# Altium PCB d_efx.PcbDoc (part 1 of 2)
Units mm, origin at the board's own origin, x right, y up, seen from the top; angles counter-clockwise.
Board outline 73.09 x 90.97 mm, 2 copper layers (Top Layer, Bottom Layer); 115 components, 88 nets, 354 pads, 67 vias.
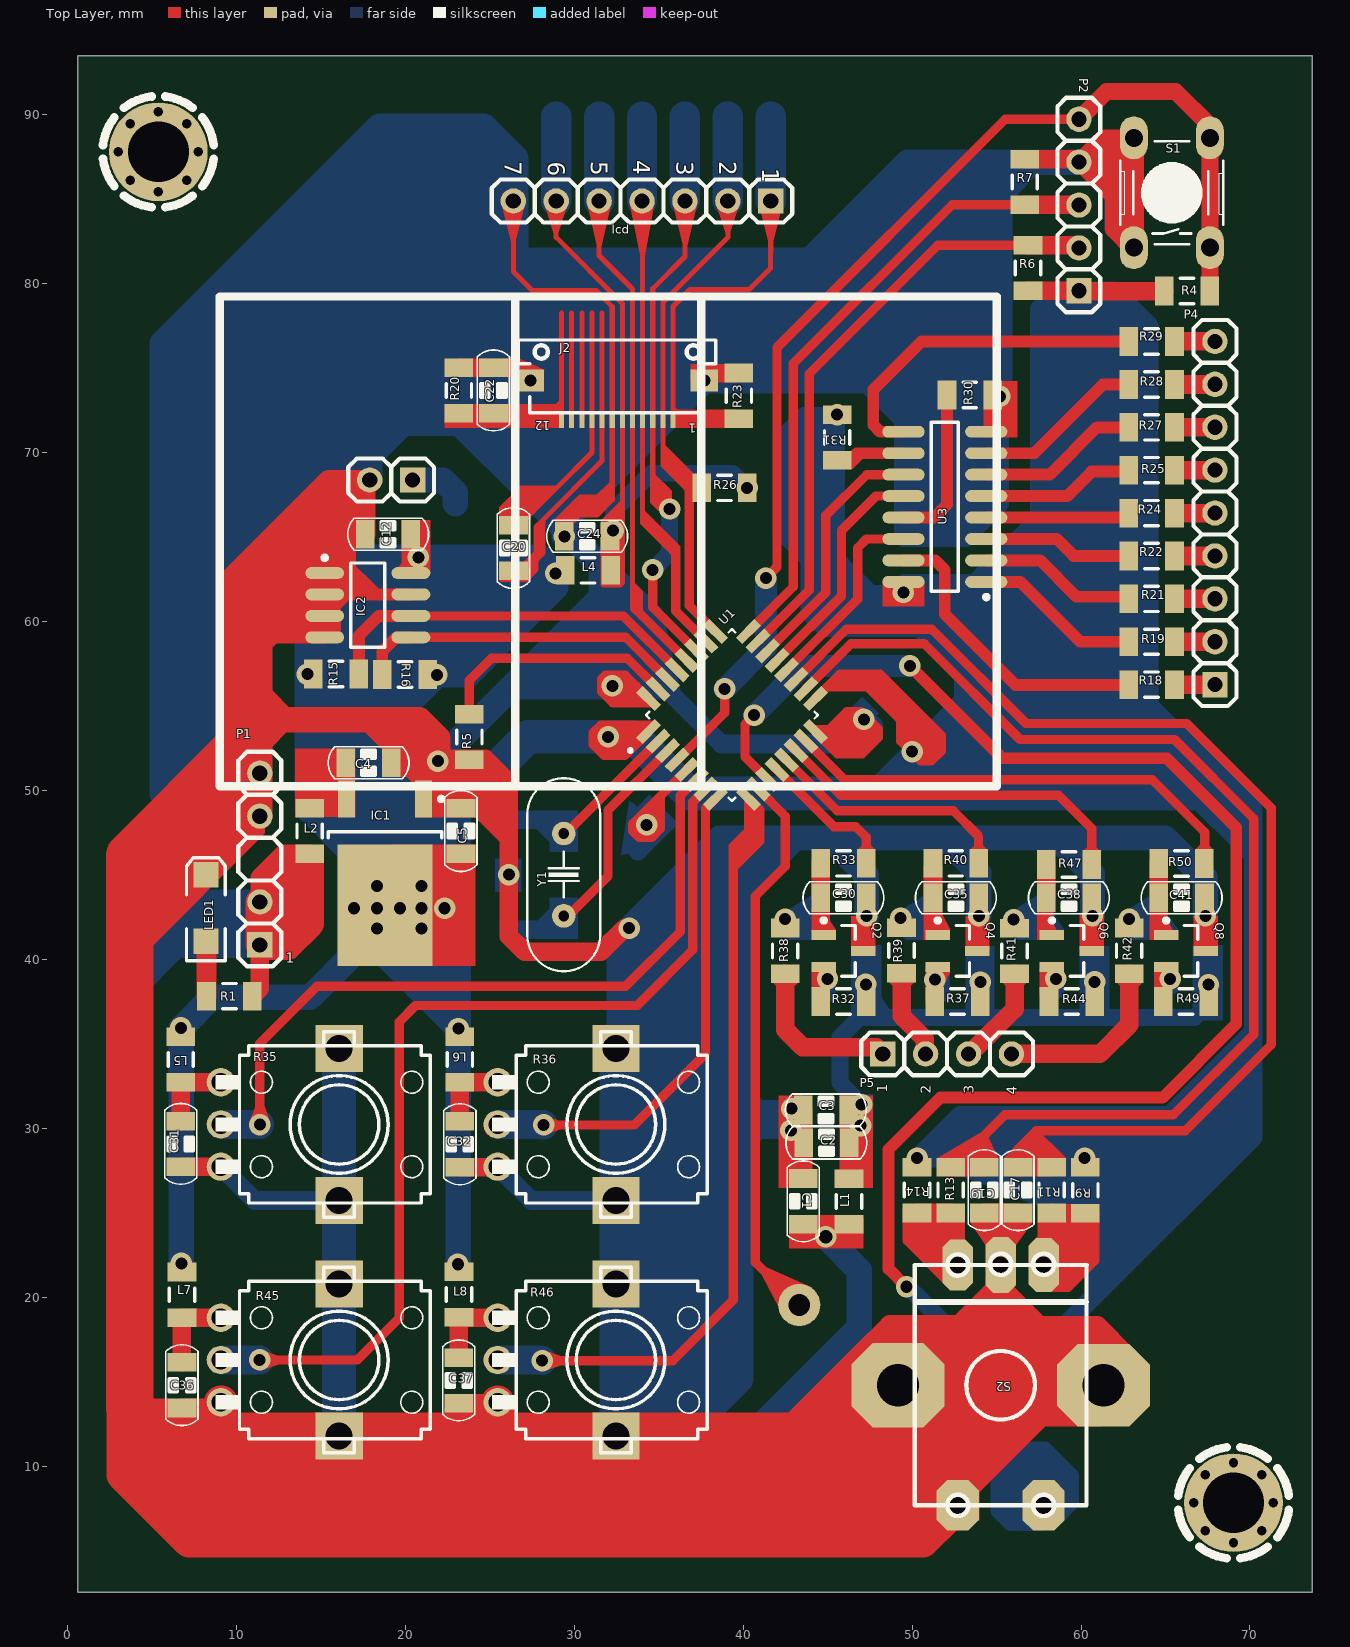
[diagram p0: Top Layer view]
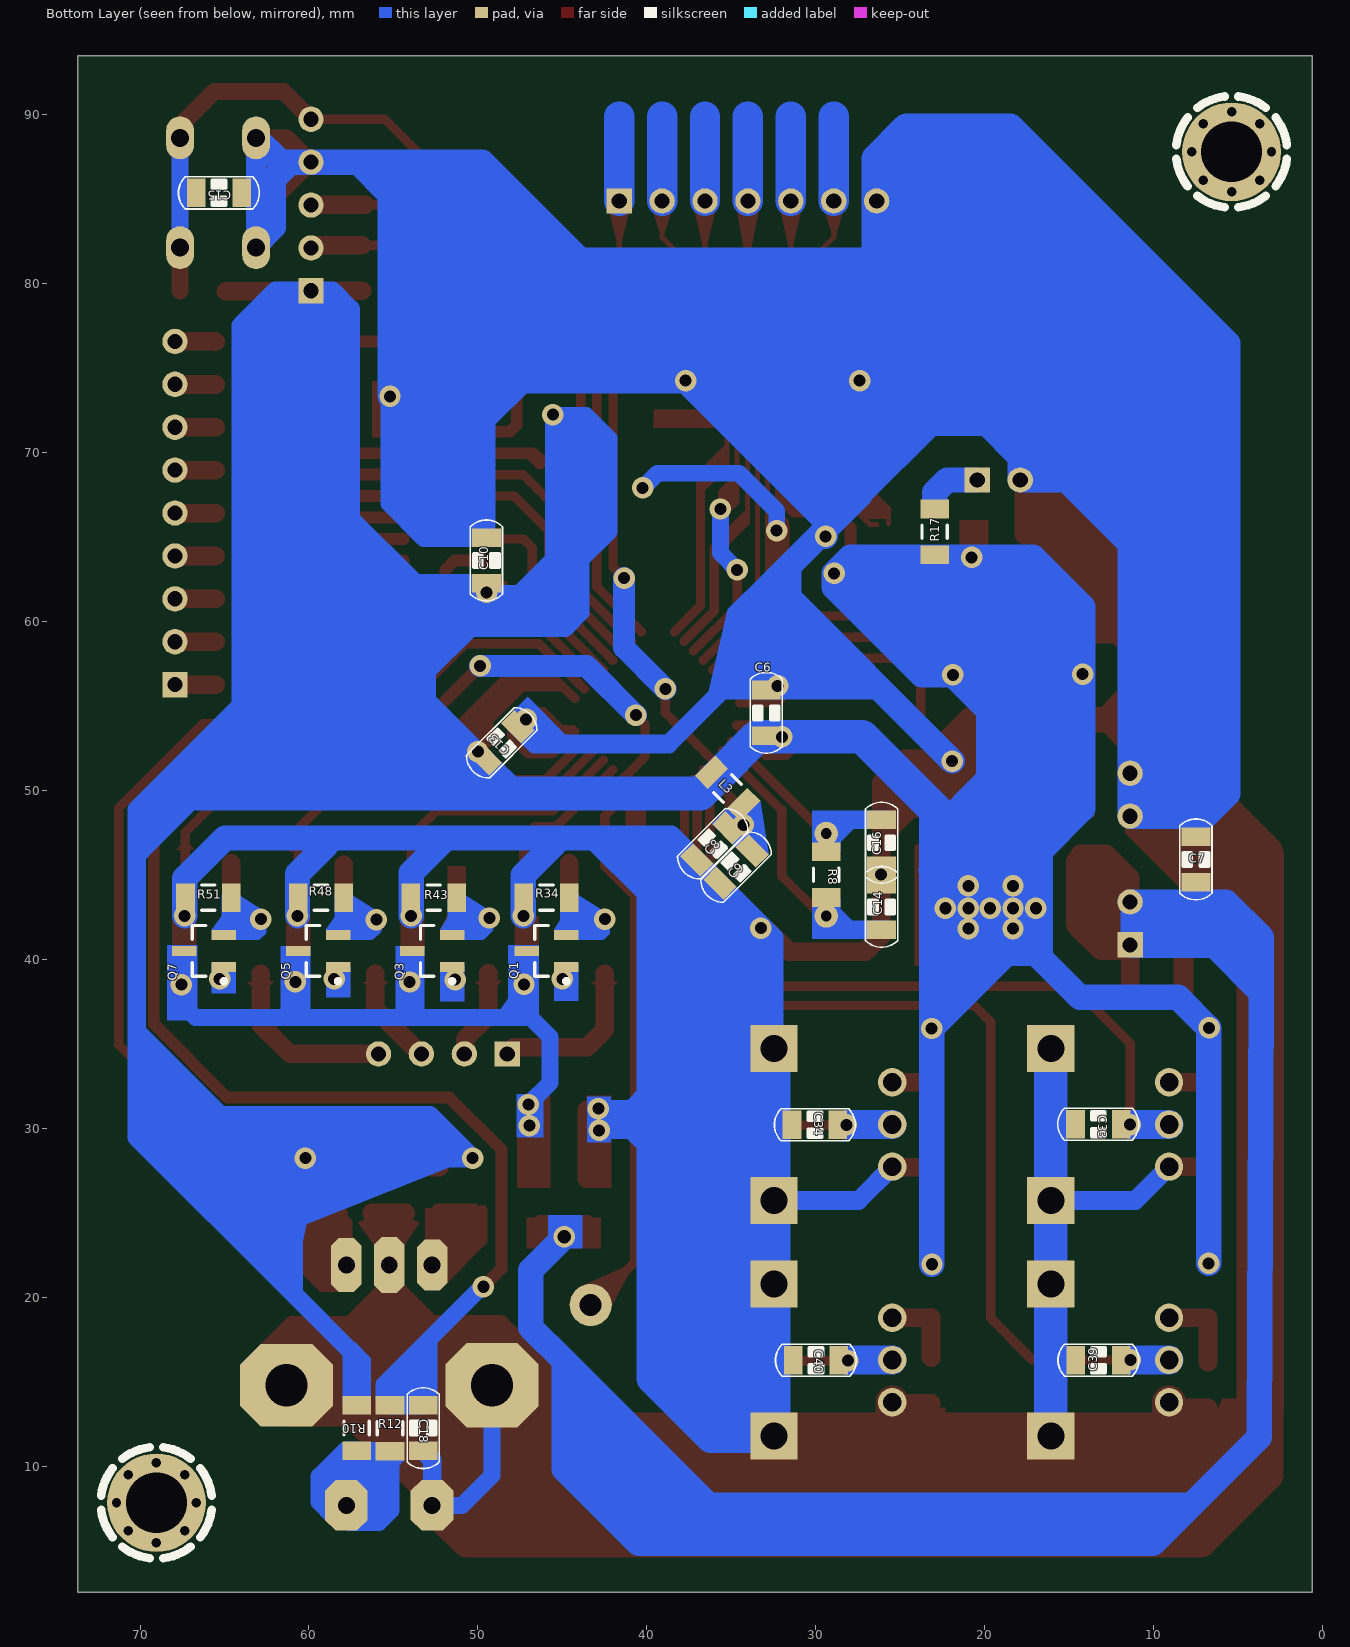
[diagram p1: Bottom Layer view, seen from below]

## Layer stack, top to bottom
Top Solder: solder mask 0.0102, Solder Resist, Dk 3.5
Top Layer: signal copper 0.0356
Dielectric 1: dielectric 0.32, FR-4, Dk 4.8
Bottom Layer: signal copper 0.0356
Bottom Solder: solder mask 0.0102, Solder Resist, Dk 3.5

## Board outline
0.6,2.528 0.6,93.502 73.693,93.502 73.693,2.528

## Design rules (kind name [scope] priority, off if disabled: settings)
Clearance [All] p1: gap=0.2 ignorepadtopadclearanceinfootprint=FALSE except(0: Arc-Hole Track-Hole SMDPad-Hole THPad-Hole Via-Hole Fill-Hole Poly-Hole Region-Hole Text-Hole)
PolygonConnect [All] p1: connectstyle=Relief reliefconductorwidth=0.254 reliefentries=4 polygonreliefangle="90 Angle" airgapwidth=0.254
RoutingVias [All] p1: holewidth=0.711 width=1.27 viastyle="Through Hole" minholewidth=0.711 minwidth=1.27 maxholewidth=0.711 maxwidth=1.27
SolderMaskExpansion [All] p1: expansion=0.102
Width [All] p1: maxlimit=4 minlimit=0.3 preferedwidth=0.635
30 further rules are at their usual default settings.

## Classes and differential pairs
component class volumes: C30 C31 C32 C33 C34 C35 C36 C37 C38 C39 C40 C41 L5 L6 L7 L8 P5 Q1 Q2 Q3 Q4 Q5 Q6 Q7 Q8 R32 R33 R34 R35 R36 R37 R38 R39 R40 R41 R42 R43 R44 R45 R46 R47 R48 R49 R50 R51
component class misc: C17 C18 C20 C22 C24 IC2 L4 P4 R9 R10 R11 R12 R13 R14 R15 R16 R17 R18 R19 R20 R21 R22 R23 R24 R25 R26 R27 R28 R29 R31 U3
component class mcu: C1 C2 C3 C4 C5 C6 C7 C8 C9 C10 C12 C13 C14 C15 C16 IC1 L1 L2 L3 LED1 P1 P2 R1 R4 R5 R6 R7 R8 S1 U1 Y1

## Components (designator, comment, footprint, x,y, rotation, side; value= is the part's Value field where it differs from the comment)
C1 "100nF" "CAPC3216L (1206)" 43.559,25.68 r90 top
C2 "100nF" "CAPC3216L (1206)" 44.925,29.138 r180 top
C3 "1uF" "CAPC3216L (1206)" 44.901,31.083 r180 top value=100nF
C4 "100nF" "CAPC3216L (1206)" 17.823,51.64 r0 top
C5 "100nF" "CAPC3216L (1206)" 23.29,47.598 r90 top
C6 "100nF" "CAPC3216L (1206)" 32.927,54.596 r90 bottom
C7 "100nF" "CAPC3216L (1206)" 7.491,45.916 r90 bottom
C8 "100nF" "CAPC3216L (1206)" 36.092,46.843 r315 bottom
C9 "1uF" "CAPC3216L (1206)" 34.712,45.463 r315 bottom value=100nF
C10 "100nF" "CAPC3216L (1206)" 49.493,63.618 r90 bottom
C12 "100nF" "CAPC3216L (1206)" 18.98,65.174 r180 top
C13 "100nF" "CAPC3216L (1206)" 48.588,52.819 r135 bottom
C14 "100nF" "CAPC3216L (1206)" 26.099,43.112 r270 bottom
C15 "100nF" "CAPC3216L (1206)" 65.328,85.377 r180 bottom
C16 "100nF" "CAPC3216L (1206)" 26.099,46.905 r270 bottom
C17 "100nF" "CAPC3216L (1206)" 56.271,26.337 r90 top
C18 "100nF" "CAPC3216L (1206)" 53.237,12.249 r270 bottom
C19 "100nF" "CAPC3216L (1206)" 54.279,26.337 r90 top
C20 "100nF" "CAPC3216L (1206)" 26.399,64.352 r90 top
C22 "100nF" "CAPC3216L (1206)" 25.215,73.68 r90 top
C24 "100nF" "CAPC3216L (1206)" 30.766,65.047 r180 top
C30 "100nF" "CAPC3216L (1206)" 45.937,43.653 r0 top
C31 "100nF" "CAPC3216L (1206)" 6.705,29.075 r270 top
C32 "100nF" "CAPC3216L (1206)" 23.229,29.057 r270 top
C33 "100nF" "CAPC3216L (1206)" 13.272,30.246 r0 bottom
C34 "100nF" "CAPC3216L (1206)" 30.052,30.208 r0 bottom
C35 "100nF" "CAPC3216L (1206)" 52.589,43.653 r0 top
C36 "100nF" "CAPC3216L (1206)" 6.776,14.791 r270 top
C37 "100nF" "CAPC3216L (1206)" 23.159,15.077 r270 top
C38 "100nF" "CAPC3216L (1206)" 59.285,43.653 r0 top
C39 "100nF" "CAPC3216L (1206)" 13.261,16.273 r0 bottom
C40 "100nF" "CAPC3216L (1206)" 29.985,16.268 r0 bottom
C41 "100nF" "CAPC3216L (1206)" 65.959,43.653 r0 top
IC1 "IC_AMS1117CD-3.3" TO252-3M 18.796,45.097 r270 top
IC2 "IC_AT24c256" SO8_NARROW_M 17.779,60.968 r0 top
J2 "Comment" PCBComponent_1 32.548,74.261 r0 top
L1 "INDUCTOR" "RESC3216X84L (1206)" 46.267,25.664 r90 top value=10mH
L2 "INDUCTOR" "RESC3216X84L (1206)" 14.333,47.601 r90 top value=10mH
L3 "INDUCTOR" "RESC3216X84L (1206)" 35.213,50.123 r225 bottom value=10mH
L4 "INDUCTOR" "RESC3216X84L (1206)" 30.822,63.035 r0 top value=10mH
L5 "INDUCTOR" "RESC3216X84L (1206)" 6.705,34.072 r90 top value=10mH
L6 "INDUCTOR" "RESC3216X84L (1206)" 23.229,34.072 r90 top value=10mH
L7 "INDUCTOR" "RESC3216X84L (1206)" 6.776,20.144 r90 top value=10mH
L8 "INDUCTOR" "RESC3216X84L (1206)" 23.174,20.153 r90 top value=10mH
lcd "Comment" MHDR1X07-254P 41.631,84.898 r180 top
LED1 "Red" "LED SMD 1206" 8.197,42.821 r90 top
P1 "MHDR_1X05" MHDR1X05-254P#1 11.386,40.859 r90 top
P2 "MHDR_1X04" MHDR1X05-254P#2 59.878,79.577 r90 top
P3 "MHDR_1X02" MHDR1X02-254P 20.431,68.38 r180 top
P4 "MHDR_1X10" MHDR1X09-254P 67.93,56.265 r90 top
P5 "MHDR_1X05" MHDR1X04-254P 48.261,34.403 r0 top
Q1 "BC817" SOT23_BEC_M 45.937,40.503 r0 bottom
Q2 "BC807" SOT23_BEC_M 45.937,40.503 r0 top
Q3 "BC817" SOT23_BEC_M 52.696,40.503 r0 bottom
Q4 "BC807" SOT23_BEC_M 52.696,40.503 r0 top
Q5 "BC817" SOT23_BEC_M 59.454,40.503 r0 bottom
Q6 "BC807" SOT23_BEC_M 59.454,40.503 r0 top
Q7 "BC817" SOT23_BEC_M 66.213,40.503 r0 bottom
Q8 "BC807" SOT23_BEC_M 66.213,40.503 r0 top
R1 "1K" "RESC3216X84L (1206)" 9.579,37.819 r0 top
R4 "1K" "RESC3216X84L (1206)" 66.276,79.562 r180 top
R5 "1K" "RESC3216X84L (1206)" 23.788,53.171 r270 top
R6 "1K" "RESC3216X84L (1206)" 56.861,80.925 r270 top
R7 "1K" "RESC3216X84L (1206)" 56.669,86.028 r90 top
R8 "1K" "RESC3216X84L (1206)" 29.377,45.011 r270 bottom
R9 "1K" "RESC3216X84L (1206)" 60.255,26.333 r90 top
R10 "1K" "RESC3216X84L (1206)" 57.177,12.25 r90 bottom
R11 "1K" "RESC3216X84L (1206)" 58.264,26.337 r90 top
R12 "1K" "RESC3216X84L (1206)" 55.203,12.244 r270 bottom
R13 "1K" "RESC3216X84L (1206)" 52.286,26.337 r90 top
R14 "1K" "RESC3216X84L (1206)" 50.294,26.337 r270 top
R15 "1K" "RESC3216X84L (1206)" 15.904,56.894 r0 top
R16 "1K" "RESC3216X84L (1206)" 19.986,56.861 r180 top
R17 "1K" "RESC3216X84L (1206)" 22.957,65.314 r270 bottom
R18 "1K" "RESC3216X84L (1206)" 64.183,56.265 r180 top
R19 "1K" "RESC3216X84L (1206)" 64.183,58.804 r180 top
R20 "1K" "RESC3216X84L (1206)" 23.17,73.68 r270 top
R21 "1K" "RESC3216X84L (1206)" 64.183,61.342 r180 top
R22 "1K" "RESC3216X84L (1206)" 64.183,63.881 r180 top
R23 "1K" "RESC3216X84L (1206)" 39.742,73.364 r270 top
R24 "1K" "RESC3216X84L (1206)" 64.183,66.419 r180 top
R25 "1K" "RESC3216X84L (1206)" 64.183,68.958 r180 top
R26 "1K" "RESC3216X84L (1206)" 38.889,67.913 r180 top
R27 "1K" "RESC3216X84L (1206)" 64.183,71.497 r180 top
R28 "1K" "RESC3216X84L (1206)" 64.183,74.035 r180 top
R29 "1K" "RESC3216X84L (1206)" 64.183,76.574 r180 top
R30 "1K" "RESC3216X84L (1206)" 53.415,73.408 r180 top
R31 "1K" "RESC3216X84L (1206)" 45.564,70.894 r270 top
R32 "1K" "RESC3216X84L (1206)" 45.937,37.506 r180 top
R33 "1K" "RESC3216X84L (1206)" 45.937,45.685 r0 top
R34 "1K" "RESC3216X84L (1206)" 45.937,43.653 r0 bottom
R35 "POT" EVUF 16.081,30.228 r270 top
R36 "POT" EVUF 32.467,30.228 r270 top
R37 "1K" "RESC3216X84L (1206)" 52.696,37.506 r180 top
R38 "1K" "RESC3216X84L (1206)" 42.483,40.507 r90 top
R39 "1K" "RESC3216X84L (1206)" 49.375,40.518 r90 top
R40 "1K" "RESC3216X84L (1206)" 52.586,45.685 r0 top
R41 "1K" "RESC3216X84L (1206)" 56.067,40.488 r90 top
R42 "1K" "RESC3216X84L (1206)" 62.848,40.509 r90 top
R43 "1K" "RESC3216X84L (1206)" 52.611,43.653 r0 bottom
R44 "1K" "RESC3216X84L (1206)" 59.454,37.506 r180 top
R45 "POT" EVUF 16.081,16.284 r270 top
R46 "POT" EVUF 32.467,16.284 r270 top
R47 "1K" "RESC3216X84L (1206)" 59.285,45.612 r0 top
R48 "1K" "RESC3216X84L (1206)" 59.285,43.653 r0 bottom
R49 "1K" "RESC3216X84L (1206)" 66.213,37.506 r180 top
R50 "1K" "RESC3216X84L (1206)" 65.955,45.682 r0 top
R51 "1K" "RESC3216X84L (1206)" 65.959,43.653 r0 bottom
S1 "SW_PB4A" THT_ALPS_SKHHAKA010 65.376,85.384 r90 top
S2 "Encoder" Encoder 55.245,14.79 r270 top
U1 "STM32F030K6T6" *QFP80P900X900X160-32N 39.335,54.466 r45 top
U3 "M74HC595M1R" SO16_M 51.943,66.793 r180 top
Y1 "11.0592 MHz" "XTAL Small" 29.377,45.011 r90 top
? "Comment" P3.6CH 5.38,87.807 r0 top
? "Comment" P3.6CH 69.029,7.833 r0 top

## Footprints (in the part's own frame and the unit in brackets; to place one, negate y for a bottom-side part, rotate by r counter-clockwise, add the part's x,y. Pads: shape width x height; smd on the part's side, far side on the other; paste and mask are expansions set on the pad)
*QFP80P900X900X160-32N [mm]
  rect 1.56x0.55 smd: 1(-4.18,2.8) 2(-4.18,2) 3(-4.18,1.2) 4(-4.18,0.4) 5(-4.18,-0.4) 6(-4.18,-1.2) 7(-4.18,-2) 8(-4.18,-2.8) 17(4.18,-2.8) 18(4.18,-2) 19(4.18,-1.2) 20(4.18,-0.4) 21(4.18,0.4) 22(4.18,1.2) 23(4.18,2) 24(4.18,2.8)
  rect 0.55x1.56 smd: 9(-2.8,-4.18) 10(-2,-4.18) 11(-1.2,-4.18) 12(-0.4,-4.18) 13(0.4,-4.18) 14(1.2,-4.18) 15(2,-4.18) 16(2.8,-4.18) 25(2.8,4.18) 26(2,4.18) 27(1.2,4.18) 28(0.4,4.18) 29(-0.4,4.18) 30(-1.2,4.18) 31(-2,4.18) 32(-2.8,4.18)
  silkscreen extent -5.84,-3.6 3.6,3.6
"CAPC3216L (1206)" [mm] "Chip Capacitor, Body 3.2x1.6mm, IPC High Density"
  rect 1.1x1.7 smd: 1(-1.35,0) 2(1.35,0)
  silkscreen extent -2.39,-0.95 2.39,0.95, body extent -1.52,-0.76 1.52,0.76, height 0.75
Encoder [mm] "an encoder that has a push-button whithin it"
  oct 3.2x1.8 hole 1: 1(-7.122,2.54)
  oct 3x1.8 hole 1: 2(-7.122,-2.54)
  oct 3.3x1.8 hole 1: 3(-7.112,0)
  oct 3x2.5 hole 1: 4(7.112,2.54)
  oct 3x2.54 hole 1: 5(7.112,-2.54)
  oct 5x5.5 hole 2.5: 6(0,-6.08)
  oct 4.9x5.5 hole 2.5: 7(0,6.08)
  silkscreen extent -7.8,-5.08 7.75,5.1
EVUF [mm]
  round 1.676 hole 1.1: 1(-2.5,-7) 2(0,-7) 3(2.5,-7)
  rect 2.8x2.8 hole 1.6: M1(4.5,0) M2(-4.5,0)
  silkscreen extent -5.5,-7.32 5.5,5.4, body extent -4.88,-7.21 4.88,5.34, height 15.26
"LED SMD 1206" [mm]
  rect 1.5x1.5 smd: 1(-1.75,0) 2(2.185,0)
  silkscreen extent -2.9,-1.15 3.2,1.15, body extent -1.65,-0.76 1.65,0.69, height 1.36
MHDR1X02-254P [mm] "Male Header 1X02 with 2.54 mm Pitch"
  rect 1.5x1.5 hole 0.9: 1(0,0)
  round 1.5 hole 0.9: 2(2.54,0)
  silkscreen extent -1.27,-1.27 3.81,1.27, body extent -1.27,-1.27 3.81,1.27, height 8.43
MHDR1X04-254P [mm] "Male Header 1X04 with 2.54 mm Pitch"
  rect 1.5x1.5 hole 0.9: 1(0,0)
  round 1.5 hole 0.9: 2(2.54,0) 3(5.08,0) 4(7.62,0)
  silkscreen extent -1.27,-1.27 8.89,1.27, body extent -1.27,-1.27 8.89,1.27, height 8.43
MHDR1X05-254P#1 [mm] "Male Header 1X05 with 2.54 mm Pitch"
  rect 1.5x1.5 hole 0.9: 1(0,0)
  round 1.5 hole 0.9: 2(2.54,0) 4(7.62,0) 5(10.16,0)
  silkscreen extent -1.27,-1.27 11.43,1.27, body extent -1.27,-1.27 11.43,1.27, height 8.43
MHDR1X05-254P#2 [mm] "Male Header 1X05 with 2.54 mm Pitch"
  rect 1.5x1.5 hole 0.9: 1(0,0)
  round 1.5 hole 0.9: 2(2.54,0) 3(5.08,0) 4(7.62,0) 5(10.16,0)
  silkscreen extent -1.27,-1.27 11.43,1.27, body extent -1.27,-1.27 11.43,1.27, height 8.43
MHDR1X07-254P [mm] "Male Header 1X07 with 2.54 mm Pitch"
  rect 1.5x1.5 hole 0.9: 1(0,0)
  round 1.5 hole 0.9: 2(2.54,0) 3(5.08,0) 4(7.62,0) 5(10.16,0) 6(12.7,0) 7(15.24,0)
  silkscreen extent -1.27,-1.27 16.51,1.27, body extent -1.27,-1.27 16.51,1.27, height 8.43
MHDR1X09-254P [mm] "Male Header 1X09 with 2.54 mm Pitch"
  rect 1.5x1.5 hole 0.9: 1(0,0)
  round 1.5 hole 0.9: 2(2.54,0) 3(5.08,0) 4(7.62,0) 5(10.16,0) 6(12.7,0) 7(15.24,0) 8(17.78,0) 9(20.32,0)
  silkscreen extent -1.27,-1.27 21.59,1.27, body extent -1.27,-1.27 21.59,1.27, height 8.43
P3.6CH [mil] "MOUNTING PAD 3.6 mm, round, 5.8 mm Diameter; with Holes around it"
  round 0 hole 22 mask-50: P(-93,0) P(-65.76,-65.76) P(-65.76,65.76) P(0,-93) P(0,93) P(65.76,-65.76) P(65.76,65.76) P(93,0)
  round 230 hole 141.73: P(0,0)
  silkscreen extent -129,-129 129,129
PCBComponent_1 [mm]
  rect 0.3x1 smd: 1(3.3,-2.3) 2(2.7,-2.3) 3(2.1,-2.3) 4(1.5,-2.3) 5(0.9,-2.3) 6(0.3,-2.3) 7(-0.3,-2.3) 8(-0.9,-2.3) 9(-1.5,-2.3) 10(-2.1,-2.3) 11(-2.7,-2.3) 12(-3.3,-2.3)
  rect 1.65x1.3 smd: MP1(5.15,0) MP2(-5.15,0)
  silkscreen extent -5.87,-1.9 5.83,2.41, body extent -5.85,-1.84 5.85,2.41, height 1.28
"RESC3216X84L (1206)" [mm] "Chip Resistor, Body 3.2x1.6x0.84 mm, IPC High Density"
  rect 1.1x1.7 smd: 1(-1.35,0) 2(1.35,0)
  silkscreen extent -0.4,-0.75 0.4,0.75, body extent -1.6,-0.8 1.6,0.8, height 0.84
SO8_NARROW_M [mm] "8-Pin Small Outline Package (SO8), IPC Low Density"
  oval 2.3x0.7 smd: 1(-2.55,1.905) 2(-2.55,0.635) 3(-2.55,-0.635) 4(-2.55,-1.905) 5(2.55,-1.905) 6(2.55,-0.635) 7(2.55,0.635) 8(2.55,1.905)
  silkscreen extent -2.67,-2.5 1,2.93, body extent -3.12,-2.39 3.07,2.44, height 1.7
SO16_M [mm] "SOIC, 16-Leads, Body 9.9x3.9mm, Pitch 1.27mm, IPC Low Density"
  oval 2.5x0.7 smd: 1(-2.45,4.445) 2(-2.45,3.175) 3(-2.45,1.905) 4(-2.45,0.635) 5(-2.45,-0.635) 6(-2.45,-1.905) 7(-2.45,-3.175) 8(-2.45,-4.445) 9(2.45,-4.445) 10(2.45,-3.175) 11(2.45,-1.905) 12(2.45,-0.635) 13(2.45,0.635) 14(2.45,1.905) 15(2.45,3.175) 16(2.45,4.445)
  silkscreen extent -2.58,-5 0.8,5.47, body extent -2,-5 2,5, height 1.75
SOT23_BEC_M [mm] "SOT23, 3-Leads, Body 2.9x1.3mm, Pitch 0.95mm, Lead Span 2.4mm, IPC Low Density"
  rect 1.45x0.6 smd: 1(-1.175,0.95) 2(-1.175,-0.95) 3(1.175,0)
  silkscreen extent -1.3,-1.5 0.7,1.92, body extent -1.23,-1.45 1.07,1.45, height 1
THT_ALPS_SKHHAKA010 [mm] "Vertical 6.0mm Square Type (Snap-in) SKHH Series; 5.0 mm Height ; 1,000,000 cycles ; 0.98N Force"
  oval 2.54x1.651 hole 1.067: 1(-3.25,2.25) 2(3.25,2.25) 3(-3.25,-2.25) 4(3.25,-2.25)
  silkscreen extent -3.05,-3.05 3.05,3.05, body extent -3.95,-3.1 3.95,3.1, height 5.03
TO252-3M [mm] "D-PAK, 3-Pads, Body 6.2x6.7mm (max), IPC Low Density"
  rect 2.2x1 smd: 1(-4.4,2.28) 3(-4.4,-2.28)
  rect 7.2x5.6 smd: 4(1.9,0)
  silkscreen extent -4.52,-3.35 -2.1,3.46, body extent -5.06,-3.27 4.88,3.27, height 2.39
"XTAL Small" [mil]
  round 55 hole 25: 1(-96.06,0) 2(96.06,0)
  silkscreen extent -225,-85 225,85, body extent -226,-89 226,89, height 142

## Part data
C1 C2 C3 C4 C5 C6 C7 C8 C9 C10 C12 C13 C14 C15 C16 C17 C18 C19 C20 C22 C24 C30 C31 C32 C33 C34 C35 C36 C37 C38 C39 C40 C41: library part CAP_Bipolar, "Bipolar Capacitor", Voltage=100V, Company="SJ Libraries", ComponentLink1Description=Datasheet, ComponentLink2Description=Reference, Designer="Eng. Saeid Jorablo", HelpURL=http://s3.picofile.com/file/7443264187/Coming_Soon_logo.gif, Publisher="SJ Unlimited", Status=Unreleased
IC1: "800mA LOW DROPOUT VOLTAGE REGULATOR", Manufacturer="Advanced Monolithic Systems, Inc.", Operating Temperature="-55 ~ +125 (C)", Category="Integrated Circuit", Code_IPC=TO-252, Company="SJ Libraries", ComponentLink1Description=Datasheet, ComponentLink1URL=http://www.advanced-monolithic.com/pdf/ds1117.pdf, ComponentLink2Description=Reference, ComponentLink2URL=http://www.advanced-monolithic.com/index.html, Designer="Eng. Saeid Jorablo", ESD Sensetive=True/False, HelpURL=http://s3.picofile.com/file/7443264187/Coming_Soon_logo.gif, Mounting Technology="Surface Mount", PackageDescription="D-PAK, 3-Pads, Body 6.2x6.7mm (max)", PinCount=3, RoHS compliant=True/False, Status=Unrelease, Update=6/5/2012
IC2: "EEPROM Memory", Operating Temperature="-55 ~ +125 (C)", Supplier Part Number 1=AT24C256-10TI-2.7-ND, Category="Integrated Circuit", Company="SJ Libraries", ComponentLink1Description=Datasheet, ComponentLink1URL=www.datasheet4u.com, ComponentLink2Description=Reference, Designer="Eng. Saeid Jorablo", ESD Sensetive=True/False, HelpURL=http://s3.picofile.com/file/7443264187/Coming_Soon_logo.gif, Mounting Technology="Surface Mount", PinCount=8, Revision 2="7/1/2012: Add Suppliers", RoHS compliant=True/False, Status=Unrelease, Supplier 1=Digi-Key, Supplier 2=Digi-Key, Supplier 3=Digi-Key, Supplier Part Number 2=AT24C256N-10SC-ND, Supplier Part Number 3=AT24C256-10PI-2.7-ND, Update=6/5/2012
J2: "SMT ZIF Connectors Low Profile WR-FPC, Horizontal, Top Contact, pitch 0.6 mm, 12 pins"
L1 L2 L3 L4 L5 L6 L7 L8: "Inductor", Code_IEC=1005, Code_JEITA=0402, Company="SJ Libraries", ComponentLink1Description=Datasheet, ComponentLink2Description=Reference, Designer="Eng. Saeid Jorablo", HelpURL=http://s3.picofile.com/file/7443264187/Coming_Soon_logo.gif, LatestRevisionDate=29-May-2009, LatestRevisionNote="IPC-7351 Footprint Added.", Mounting Technology="Surface Mount\Through-Hole", PackageDescription="Chip Inductor", PackageReference=0402-A, Published=8-Jun-2000, Publisher="SJ Unlimited", Status=Unreleased
LED1: library part LED, "LED", Color=Red, Company="SJ Libraries", ComponentLink1Description=Datasheet, ComponentLink2Description=Reference, Designer="Eng. Saeid Jorablo", HelpURL=http://s3.picofile.com/file/7443264187/Coming_Soon_logo.gif, Mounting Technology="Surface Mount\Through-Hole", Publisher="SJ Unlimited", Size="SMD 1206", Status=Unreleased
P1 P5: "Male Header 1X05"
P2: library part MHDR_1X05, "Male Header 1X05"
P3: "Male Header 1X02"
P4: "Male Header 1X10"
Q1 Q3 Q5 Q7: library part NPN_BEC, "NPN Bipolar Transistor", Company="SJ Libraries", ComponentLink1Description=Datasheet, ComponentLink2Description=Reference, Designer="Eng. Saeid Jorablo", HelpURL=http://s3.picofile.com/file/7443264187/Coming_Soon_logo.gif, LatestRevisionDate=29-May-2009, LatestRevisionNote="IPC-7351 Footprint Added.", Mounting Technology="Surface Mount\Through-Hole", PackageDescription="3-Pin SOT-23 Package 0.95 mm Pitch, 2.4 mm Lead Span", PackageReference=SOT-23B, PackageVersion=Aug-1999, Published=8-Jun-2000, Publisher="SJ Unlimited", Status=Unreleased
Q2 Q4 Q6 Q8: library part PNP_BEC, "PNP Bipolar Transistor", Company="SJ Libraries", ComponentLink1Description=Datasheet, ComponentLink2Description=Reference, Designer="Eng. Saeid Jorablo", HelpURL=http://s3.picofile.com/file/7443264187/Coming_Soon_logo.gif, LatestRevisionDate=29-May-2009, LatestRevisionNote="IPC-7351 Footprint Added.", Mounting Technology="Surface Mount\Through-Hole", PackageDescription="3-Pin SOT-23 Package 0.95 mm Pitch, 2.4 mm Lead Span", PackageReference=SOT-23B, PackageVersion=Aug-1999, Published=8-Jun-2000, Publisher="SJ Unlimited", Status=Unreleased
R1 R4 R5 R6 R7 R8 R9 R10 R11 R12 R13 R14 R15 R16 R17 R18 R19 R20 R21 R22 R23 R24 R25 R26 R27 R28 R29 R30 R31 R32 R33 R34 R37 R38 R39 R40 R41 R42 R43 R44 R47 R48 R49 R50 R51: library part RES, "Resistor", Power="1/8 W", Tolerance=5%, Category=Resistors, Company="SJ Libraries", ComponentLink1Description=Datasheet, ComponentLink2Description=Reference, Designer="Eng. Saeid Jorablo", HelpURL=http://s3.picofile.com/file/7443264187/Coming_Soon_logo.gif, Mounting Technology="Surface Mount\Through-Hole", PackageDescription="SMD & TH Resistors", Publisher="SJ Unlimited", Status=Unreleased
R35 R36 R45 R46: library part RES_POT_LIN
S1: "4 Pin Push Button Switch", Category=MISC, Company="SJ Libraries", ComponentLink1Description=Datasheet, Designer="Eng. Saeid Jorablo", HelpURL=http://s3.picofile.com/file/7443264187/Coming_Soon_logo.gif, Mounting Technology="Surface Mount\Through-Hole", Pin Count=0, Update Date=6/3/2012
U1: "MCU 32-Bit STM32F ARM Cortex M0 RISC 32KB Flash 2.5V/3.3V 32-Pin LQFP Tray", Package="LQFP-32 STMicroelectronics", Availability=Unavailable, MF=STMicroelectronics, MP=STM32F030K6T6, Price=None, SnapEDA_Link=https://www.snapeda.com/parts/STM32F030K6T6/STMicroelectronics/view-part/?ref=snap
U3: "8 Bit Shift Register with Output Latches (3 STATE)", Code_IPC=SOIC127P600-16, ComponentLink1Description="Manufacturer Link", ComponentLink1URL=http://www.st.com/, ComponentLink2Description=Datasheet, ComponentLink2URL=http://www.st.com/stonline/products/literature/ds/1989/m74hc595.pdf, DatasheetVersion=Apr-1993, LatestRevisionDate=13-Apr-2006, LatestRevisionNote="IPC-7351 Footprint Added.", PackageDescription="16-Pin Small Outline Integrated Circuit 1.27 mm Pitch", PackageReference=SO16, PackageVersion=May-1998, Published=8-Jun-2000, Publisher="Altium Limited"
Y1: library part XTAL_Crystal, "XTAL Crystal", Company="SJ Libraries", ComponentLink1Description=Datasheet, ComponentLink2Description=Reference, Design Date=11/04/2011, Designer="Eng. Saeid Jorablo", HelpURL=http://s3.picofile.com/file/7443264187/Coming_Soon_logo.gif, Mounting Technology="Surface Mount\Through-Hole", Publisher="SJ Unlimited", Status=Unreleased

## Free pads (board coordinates)
  round 2.5 hole 1.3: 2(43.32,19.544)

## Via types
v1: diameter 1.27, hole 0.711, Top Layer to Bottom Layer, 66 vias
v2: diameter 1.27, hole 0.8, Top Layer to Bottom Layer, 1 vias

## Nets (pads, with @x,y where several pads share a name; then routed paths per layer and width w, separated by ;. In a path a pad name is that pad's centre, name@x,y a point inside that pad or via, vN(x,y) a via of type N, cw(c..) or ccw(c..) an arc to the next point about the centre after c; other vN are vias at no path point)
+3.3V: C5.1 C6.1 C10.1 C12.1 C13.1 IC1.4 IC2.8 L3.1 L4.1 L5.2 L6.2 L7.2 L8.2 P2.1 R4.2 R6.2 R9.2 R10.2 R14.1 R15.1 R16.1 R17.2 R31.1 U1.1 U1.17 U3.16 | length 459.4
  Top Layer w0.55: v1(32.008,53.175) v1@32.323,53.49 ; v1@32.198,52.865 33.775,52.865 ; U1.1@34.683,53.853 32.686,53.853 ; U1.17@44.271,55.441 44.972,56.142 ; v1@32.323,53.49 32.686,53.853 ; v1@32.323,53.49 U1.1@34.4,53.49 33.775,52.865 ; 32.686,53.853 31.56,53.853 31.108,53.4 31.108,52.742 31.777,52.073 32.983,52.073 33.775,52.865 ; 44.972,56.142 47.356,56.142 49.335,54.162 49.335,52.932 50.511,51.756 51.137,51.756 51.719,52.339 51.719,53.26 48.099,56.88 45.71,56.88 44.972,56.142
  Top Layer w1.1: R6.2@56.861,79.575 P2.1@59.876,79.575 ; P2.1@59.878,79.577 59.893,79.562 R4.2@64.926,79.562
  Top Layer w1.5: P2.1@59.876,79.575 P2.1@59.878,79.577
  Bottom Layer w0.9: v1(49.481,61.72) 49.196,61.72 47.567,61.72 45.564,63.722 v1(45.564,72.244) 43.564,72.244 42.174,70.854 42.174,65.303 43.848,63.629 43.848,60.504 44.814,59.539 50.546,59.539
  Bottom Layer w1.1: 47.507,49.829 C13.1@49.543,51.864 ; C10.1@49.196,62.087 49.196,61.72 49.196,60.889 50.546,59.539 53.018,57.067 53.018,55.308 v1(50.005,52.295) ; v1@49.354,61.71 51.351,61.71 51.341,61.72 v1(49.481,61.72) ; C10.1@49.569,62.26 53.692,62.26 ; R10.2@57.476,13.734 57.476,16.76 60.915,20.199 ; 59.878,60.097 59.878,61.841 ; 66.534,49.829 69.974,46.389 ; 53.692,62.26 57.534,66.102 57.534,78.502 58.609,79.577 P2.1@59.878,79.577 ; 53.692,62.26 59.459,62.26 59.878,61.841 ; 59.878,61.841 64.041,57.678 ; 59.878,61.841 P2.1@59.878,79.577 ; P2.1@59.878,79.577 61.975,79.577 64.041,77.511 64.041,57.678 ; 60.915,20.199 60.915,24.164 64.982,28.231 ; 60.915,20.199 70.194,29.479 70.194,33.444 ; 64.041,57.678 64.041,55.028 70.194,48.875 70.194,35.723 ; 64.982,28.231 v1(50.304,28.231) 52.849,30.776 65.247,30.776 70.194,35.723 ; 64.982,28.231 70.194,33.444 ; 70.194,33.444 70.194,35.723
  Bottom Layer w1.5: v1(6.736,22.007) 6.736,35.95 8.537,37.751 14.356,37.751 16.975,40.371 ; 16.695,45.024 16.695,46.426 14.197,48.924 v1(14.197,56.891) ; 18.027,45.264 23.125,45.264 ; 18.081,40.962 v1(23.134,35.91) ; 23.125,44.944 23.125,45.264 ; v1@23.134,21.952 v1(23.134,35.91) ; 23.134,40.032 v1(23.134,35.91) ; 23.151,45.264 23.125,45.264 ; v1(14.197,56.891) 21.832,56.891 v1(21.874,56.849) ; v1(14.197,56.891) 14.197,60.879 17.117,63.8 v1(20.771,63.8) 27.955,63.8 v1(28.903,62.852) 28.903,62.036 23.716,56.849 v1(21.874,56.849) ; v1(21.874,56.849) 19.762,54.737 19.762,50.674 22.883,47.552 23.125,47.31 23.125,45.264
  Bottom Layer w2: 22.883,46.352 22.883,47.552 22.883,48.816 27.242,53.175 v1(32.008,53.175) C6.1@33.465,53.175 ; C6.1@33.465,53.183 35.869,50.779 36.82,49.829 47.507,49.829 66.534,49.829
  other v1: 23.114,21.952 60.212,28.231 6.712,35.95 18.32,41.816 20.964,41.816 16.961,43.027 18.32,43.027 19.679,43.027 20.964,43.027 22.322,43.027 18.32,44.356 20.964,44.356
+5V: C2.1 C3.1 L1.2 Q1.3 Q3.3 Q5.3 Q7.3 R32.1 R37.1 R44.1 R49.1 | length 39.7
  Top Layer w1: C3.1@46.251,31.083 46.251,27.03 L1.2@46.267,27.014
  Bottom Layer w1: v1@46.894,38.435 46.894,36.567 ; v1(46.957,30.159) 46.957,31.463 45.726,32.694 45.726,35.399 46.894,36.567 ; v1(54.045,38.66) 54.045,36.6 54.078,36.567 ; v1(60.804,38.674) 60.804,36.573 60.798,36.567 ; v1(67.547,38.509) 67.547,37.396 66.718,36.567 60.798,36.567 ; 46.894,36.567 54.078,36.567 ; 54.078,36.567 60.798,36.567
  other v1: 47.012,31.408 47.268,38.525
ADC0: C33.1 R35.2 U1.6 | length 44.2
  Top Layer w0.55: v1(11.385,30.211) 11.385,35.016 14.775,38.405 33.035,38.405 36.271,41.641 36.271,49.704 U1.6@37.228,50.661
  Bottom Layer w1.7: R35.2@9.081,30.228 11.369,30.228 v1(11.385,30.211)
ADC1: C39.1 R45.2 U1.7 | length 58.1
  Top Layer w0.55: v1(11.378,16.289) 17.161,16.289 19.64,18.768 19.64,36.299 20.606,37.265 33.723,37.265 37.021,40.563 37.021,49.322 U1.7@37.794,50.096
  Bottom Layer w1.7: R45.2@9.081,16.284 11.372,16.284 v1(11.378,16.289)
ADC2: C34.1 R36.2 U1.8 | length 29.9
  Top Layer w0.55: v1(28.183,30.201) 33.55,30.201 37.771,34.421 37.771,48.941 U1.8@38.36,49.53
  Top Layer w0.635: R36.2@25.009,29.936 R36.2@25.502,29.936
  Bottom Layer w1.7: R36.2@25.467,30.228 28.156,30.228 v1(28.183,30.201)
ADC3: C40.1 R46.2 U1.9 | length 50.5
  Top Layer w0.55: v1(28.101,16.248) 35.83,16.248 39.416,19.834 39.416,45.439 ; 39.416,45.439 39.416,46.686 40.311,47.582 U1.9@40.311,49.53 40.522,49.319 40.979,48.862 40.979,47.003 39.416,45.439
  Bottom Layer w1.7: R46.2@25.467,16.284 28.065,16.284 v1(28.101,16.248)
BOOT0: R5.1 U1.31 | length 14.5
  Top Layer w0.55: R5.1@23.788,54.521 23.788,56.515 25.105,57.832 33.141,57.832 U1.31@34.966,56.007
EEP_SCL: IC2.6 R15.2 U1.29 | length 22.9
  Top Layer w0.55: IC2.6@20.329,60.333 32.902,60.333 U1.29@36.097,57.138
  Top Layer w0.7: R15.2@17.254,56.894 17.254,59.161 18.426,60.333 IC2.6@20.329,60.333
EEP_SDA: IC2.5 R16.2 U1.30 | length 19.6
  Top Layer w0.55: IC2.5@20.329,59.063 33.041,59.063 U1.30@35.531,56.573
  Top Layer w0.7: R16.2@18.636,56.861 18.636,58.235 19.465,59.063 IC2.5@20.329,59.063
ENC_1: C19.2 R13.2 U1.18 | length 67.1
  Top Layer w0.55: U1.18@43.705,56.007 46.379,58.681 50.72,58.681 56.384,53.016 65.537,53.016 70.227,48.326 70.227,35.558 65.467,30.797 55.501,30.797 54.249,29.545 54.249,27.687 C19.2@54.249,27.622
  Top Layer w1.1: R13.2@52.286,27.687 54.249,27.687 C19.2@54.279,27.687
ENC_2: C17.2 R11.2 U1.19 | length 68.4
  Top Layer w0.55: U1.19@43.14,56.573 46.106,59.539 51.172,59.539 56.748,53.963 66.258,53.963 71.264,48.957 71.264,34.941 66.171,29.847 57.352,29.847 56.271,28.766 C17.2@56.271,27.687
  Top Layer w1.1: C17.2@56.271,27.687 R11.2@58.264,27.687
ENC_BTN: C18.1 R12.1 U1.11 | length 96.9
  Top Layer w0.55: v1(40.65,54.455) 40.102,53.908 40.102,52.002 U1.11@41.443,50.661
  Top Layer w0.7: v1(49.668,20.62) 48.61,21.678 48.61,28.749 51.681,31.82 64.832,31.82 69.191,36.18 69.191,47.79 65.078,51.903 55.328,51.903 v1(49.862,57.37)
  Bottom Layer w0.55: R12.1@55.197,13.599 R12.1@55.203,13.594
  Bottom Layer w1: v1@49.715,20.667 52.887,17.495 ; C18.1@52.887,13.713 52.887,17.495 ; R12.1@55.552,14.041 55.552,14.829 52.887,17.495
  Bottom Layer w1.1: C18.1@53.237,13.599 R12.1@55.197,13.599
  Bottom Layer w1.3: v1(40.65,54.455) 43.564,57.37 v1(49.862,57.37)
GND: C1.2 C2.2 C3.2 C4.2 C5.2 C6.2 C7.2 C8.2 C9.2 C10.2 C12.2 C13.2 C14.1 C15.2 C16.2 C17.1 C18.2 C19.1 C22.2 C24.2 C30.2 C31.2 C32.2 C33.2 C34.2 C35.2 C36.2 C37.2 C38.2 C39.2 C40.2 C41.2 IC1.1 IC2.1 IC2.2 IC2.3 IC2.4 IC2.7 J2.7 J2.MP1 J2.MP2 lcd.7 LED1.2 P1.4 P1.5 P2.4 P3.2 Q2.3 Q4.3 Q6.3 Q8.3 R5.2 R7.2 R20.1 R23.1 R30.1 R34.2 R35.3 R35.M1 R35.M2 R36.3 R36.M1 R36.M2 R43.2 R45.3 R45.M1 R45.M2 R46.3 R46.M1 R46.M2 R48.2 R51.2 S1.1 S1.2 S2.3 S2.5 S2.6 S2.7 U1.16 U1.32 U3.8 | length 945.4
  Top Layer w0.3: lcd.7@26.391,84.898 26.391,80.725 27.513,79.603 31.284,79.603 32.248,78.64 J2.7@32.248,71.96 32.248,67.212 31.34,66.304 30.279,66.304 C24.2@29.468,65.493 ; C24.2@29.017,65.571 29.017,66.043 30.358,67.384 31.411,67.384 32.182,68.155
  Top Layer w0.55: v1@32.858,56.167 33.674,56.167 ; U1.32@34.4,55.441 33.674,56.167 ; U1.32@34.505,55.186 32.283,55.186 31.632,55.838 31.632,56.602 31.855,56.826 33.015,56.826 33.674,56.167 ; U1.16@44.271,53.49 45.588,52.173 47.037,52.173 47.997,53.134 47.997,53.637 46.969,54.666 46.138,54.666 U1.16@44.763,53.291
  Top Layer w0.635: 3.687,43.944 4.626,43.944 ; 4.353,40.55 11.386,47.583 P1.4@11.386,48.479 ; lcd.7@26.391,84.898 26.455,84.834 26.455,83.642
  Top Layer w0.7: 11.386,58.766 11.683,59.063 IC2.4@15.229,59.063 ; IC2.2@15.229,61.603 18.263,61.603 ; 16.218,63.479 16.388,63.479 18.263,61.603 ; IC2.7@20.329,61.603 18.263,61.603
  Top Layer w1: IC2.3@15.229,60.333 IC2.2@15.229,61.603 IC2.1@15.229,62.873 15.229,63.157 17.247,65.174 C12.2@17.63,65.174 ; P2.4@59.697,87.378 P2.4@59.878,87.197 ; 62.018,85.102 61.973,85.102 P2.4@59.878,87.197 ; S1.2@63.126,88.634 61.315,88.634 P2.4@59.878,87.197
  Top Layer w1.1: C31.2@6.705,27.725 9.079,27.725 R35.3@9.081,27.728 ; C36.2@6.776,13.441 8.739,13.441 R45.3@9.081,13.784 ; 22.843,51.864 24.727,51.864 26.131,50.459 26.131,47.172 ; C37.2@23.159,13.727 25.41,13.727 R46.3@25.467,13.784 ; R20.1@23.17,75.03 C22.2@25.215,75.03 26.628,75.03 v1(27.398,74.261) ; C32.2@23.229,27.707 25.446,27.707 R36.3@25.467,27.728 ; 23.75,49.553 26.131,47.172 ; v1(33.251,41.855) 32.984,41.855 31.573,40.445 27.062,40.445 26.131,41.376 v1(26.131,45.019) 26.131,47.172 ; 42.054,11.784 46.956,16.686 ; C3.2@43.551,31.083 43.559,31.075 C1.2@43.559,27.03 ; S2.6@46.956,15.353 46.956,16.686 ; S2.6@46.962,13.864 46.962,12.06 47.239,11.784 49.165,9.858 ; S2.5@52.285,6.738 52.025,6.998 49.165,9.858 ; S2.5@52.705,7.678 52.705,7.946 59.549,14.79 S2.7@61.073,14.79 ; C19.1@54.279,24.987 C17.1@56.271,24.987 ; S2.3@55.245,21.902 S2.3@55.245,20.87 ; 56.667,18.334 57.529,18.334 ; R7.2@56.669,87.378 P2.4@59.697,87.378 ; S2.7@61.325,14.79 S2.7@61.073,14.79 ; S2.7@62.787,16.525 60.977,18.334 57.529,18.334 ; 46.956,16.686 48.662,18.392 52.767,18.392 ; 49.165,9.858 S2.6@49.165,14.79 52.767,18.392 ; 52.767,18.392 S2.3@55.245,20.87 ; S2.3@55.245,20.87 55.245,20.618 57.529,18.334 ; 57.529,18.334 S2.7@61.073,14.79
  Top Layer w1.2: 9.383,58.176 9.383,62.314 15.449,68.38 P3.2@17.891,68.38 17.63,68.118 C12.2@17.63,65.174 ; 62.018,87.883 62.018,85.102 62.018,83.242 S1.1@63.126,82.134 S1.2@63.126,88.634
  Top Layer w1.5: P1.4@11.386,48.479 P1.5@11.386,51.019 11.386,52.899 ; 11.386,58.766 11.386,52.899 ; 11.683,59.063 12.953,60.333 IC2.3@15.229,60.333 ; 20.458,51.64 20.472,51.64 ; v1(21.92,51.742) 21.92,53.087 20.818,54.189 17.923,54.189 ; 22.764,51.504 22.628,51.64 20.472,51.64 ; 11.386,52.899 12.676,54.189 17.923,54.189 ; 17.923,54.189 20.472,51.64
  Top Layer w1.7: C4.2@19.579,51.64 20.458,51.64
  Top Layer w2: 3.3,13.889 3.3,9.499 7.207,5.591 50.618,5.591 52.025,6.998 S2.5@52.705,7.678 ; 9.031,11.784 9.081,11.834 R45.3@9.081,13.784 ; R46.3@25.467,13.784 25.467,11.996 25.68,11.784
  Top Layer w2.8: 14.047,61.46 12.859,61.46 10.185,58.786 10.185,52.631 3.687,46.133 3.687,43.944 3.687,13.433 5.336,11.784 9.031,11.784 R45.M1@16.081,11.784 25.68,11.784 R46.M1@32.467,11.784 ; R46.M1@32.842,11.784 42.054,11.784 47.239,11.784 48.014,11.784
  Bottom Layer w1: S2.6@49.165,14.79 49.165,9.453 50.94,7.678 S2.5@52.705,7.678
  Bottom Layer w1.1: R35.3@9.081,27.728 11.081,25.728 R35.M1@16.081,25.728 ; 24.85,54.601 26.195,55.946 C6.2@32.927,55.946 35.516,55.946 38.711,52.75 46.624,52.75 C13.2@47.726,53.852 ; R36.3@25.467,27.728 27.467,25.728 R36.M1@32.467,25.728 ; R36.M2@32.467,34.728 32.467,41.308 C9.2@35.667,44.508 C8.2@37.047,45.888 38.55,47.391 44.027,47.391 ; 47.135,74.261 49.493,71.903 C10.2@49.493,64.968 53.167,64.968 55.2,67.001 v1(55.2,73.336) ; S2.5@52.705,7.678 52.705,10.367 C18.2@53.237,10.899 ; S2.3@55.245,20.87 S2.3@55.245,21.902
  Bottom Layer w1.2: 61.962,86.527 61.962,86.342 61.962,83.299 S1.1@63.126,82.134 63.126,85.177 S1.2@63.126,88.634
  Bottom Layer w1.5: P1.4@11.386,48.479 6.938,48.479 5.615,49.802 5.615,76.478 10.545,81.408 10.752,81.408 26.391,81.408 30.743,81.408 ; P1.4@11.386,48.539 P1.5@11.386,51.019 11.386,64.615 15.15,68.38 P3.2@17.891,68.38 17.891,69.75 19.862,71.721 23.216,71.721 ; v1(21.92,51.742) 32.128,61.95 32.921,61.95 ; v1@27.479,74.279 v1@27.461,74.261 ; 27.738,67.199 27.398,67.539 ; 28.183,76.688 27.398,75.903 ; v1(29.416,65.047) v1@29.416,65.455 ; R36.M2@32.467,34.728 35.986,34.728 39.598,38.34 39.846,38.588 39.846,43.978 43.059,47.19 64.971,47.19 67.361,44.8 v1(67.361,42.579) ; R46.M1@32.502,11.498 R46.M1@32.583,11.417 ; C6.2@32.921,56.285 32.921,61.95 ; 45.37,46.922 47.304,44.988 v1(47.304,42.579) ; 51.895,47.178 53.95,45.122 v1(53.95,42.579) ; 58.942,46.805 60.68,45.067 v1(60.68,42.579) ; 63.126,85.177 61.962,86.342 61.106,87.197 ; S1.2@63.126,88.634 61.69,87.197 61.106,87.197 ; 23.216,71.721 27.398,75.903 ; 23.216,71.721 27.398,67.539 ; 27.398,67.539 v1@27.398,74.197 ; 27.398,67.539 27.398,67.473 v1@29.416,65.455 ; v1@27.398,74.197 v1@27.461,74.261 ; v1@27.398,74.197 v1(27.398,74.261) ; v1(27.398,74.261) 27.398,75.903 ; v1(27.398,74.261) v1@27.461,74.261 ; 27.398,75.903 27.398,78.062 30.743,81.408 ; v1@27.461,74.261 v1(37.698,74.261) ; v1@29.416,65.455 32.921,61.95 ; v1@29.416,65.455 29.416,65.979 v1(37.698,74.261) ; 30.743,81.408 43.956,81.408 49.745,87.197 57.107,87.197 ; v1(37.698,74.261) 47.135,74.261 54.275,74.261 v1(55.2,73.336) 55.2,85.29 57.107,87.197 ; 57.107,87.197 P2.4@59.878,87.197 61.106,87.197
  Bottom Layer w1.8: 9.81,80.466 10.752,81.408 18.518,89.174 24.622,89.174 26.391,87.405 lcd.7@26.391,84.898 26.391,81.408 26.391,79.417
  Bottom Layer w2: R45.M1@16.081,11.784 R45.M2@16.081,20.784 R35.M1@16.081,25.728 R35.M2@16.081,34.728 ; R46.M1@32.467,11.784 R46.M1@32.502,11.784 ; R46.M1@32.502,11.498 R46.M1@32.502,11.784 ; R36.M2@32.502,34.436 32.502,30.208 R46.M1@32.502,11.784 ; 39.598,39.451 39.598,38.34 39.598,15.211 36.171,11.784 R46.M1@32.502,11.784
  other v1: 42.819,29.873 42.864,31.164 47.144,54.212 32.253,56.19
LCD_A0: J2.3 lcd.3 U1.27 | length 37.1
  Top Layer w0.3: lcd.3@36.551,84.898 36.551,81.612 34.648,79.709 J2.3@34.648,71.96 34.648,68.661 ; U1.27@37.223,58.27 U1.27@37.228,58.27 ; 34.648,68.661 34.648,67.079 35.064,66.662 v1(35.646,66.662) 35.646,67.663 34.648,68.661
  Top Layer w0.55: v1(34.645,63.06) 34.645,60.853 U1.27@37.228,58.27
  Bottom Layer w1: v1(34.645,63.06) 35.646,64.06 v1(35.646,66.662)
  Bottom Layer w1.8: lcd.3@36.551,84.898 36.551,89.898
LCD_CSB: J2.1 lcd.1 R23.2 | length 22.7
  Top Layer w0.3: J2.1@35.848,71.96 35.848,78.654 36.849,79.656 40.367,79.656 41.619,80.908 41.619,82.226 ; 41.631,81.915 lcd.1@41.631,84.898
  Bottom Layer w1.8: lcd.1@41.631,84.898 41.631,89.898
LCD_RST: J2.2 lcd.2 R26.2 U1.25 | length 37.4
  Top Layer w0.3: 35.295,70.343 36.945,68.693 36.945,67.547 ; 36.787,67.711 35.248,69.251 J2.2@35.248,71.96 35.248,78.898 39.091,82.742 lcd.2@39.091,84.898
  Top Layer w0.55: 36.815,68.238 36.815,60.946 U1.25@38.36,59.401
  Bottom Layer w1.8: lcd.2@39.091,84.898 39.091,89.898